# EAGLE board IO_Shield_With_Power_Supply_PCB (EAGLE 6.4)
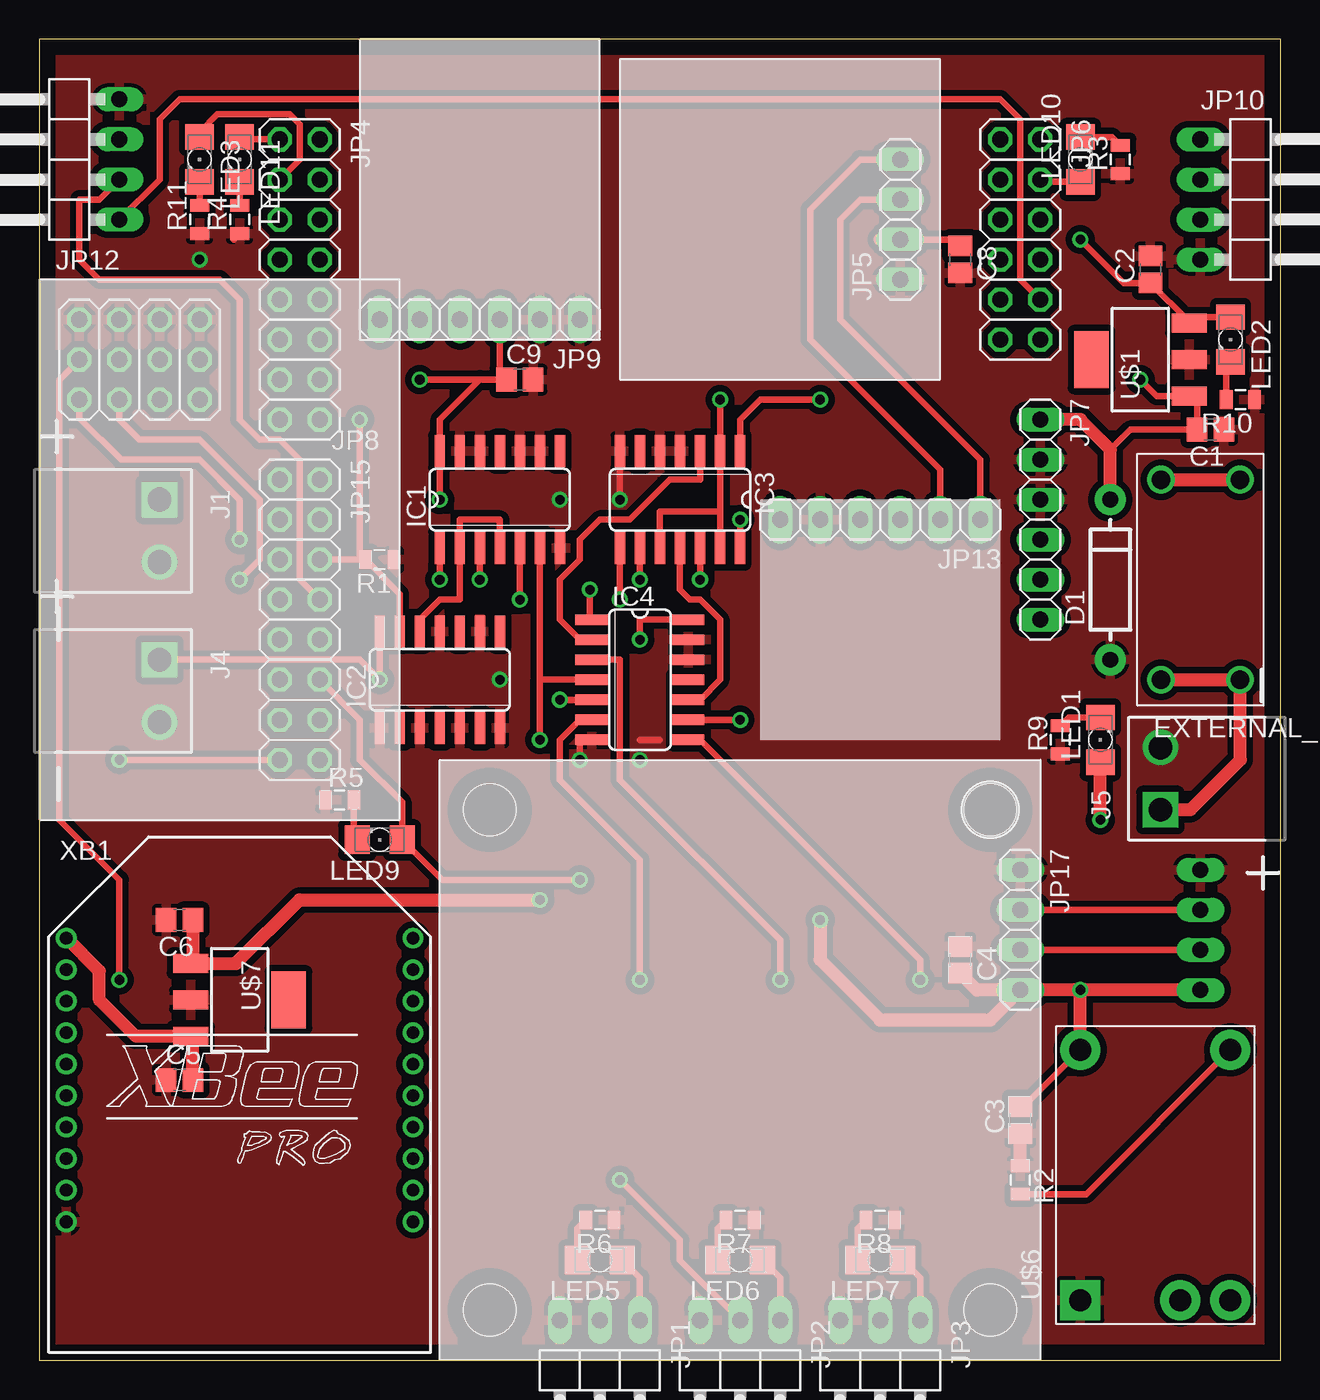
[diagram p0: board, top side]
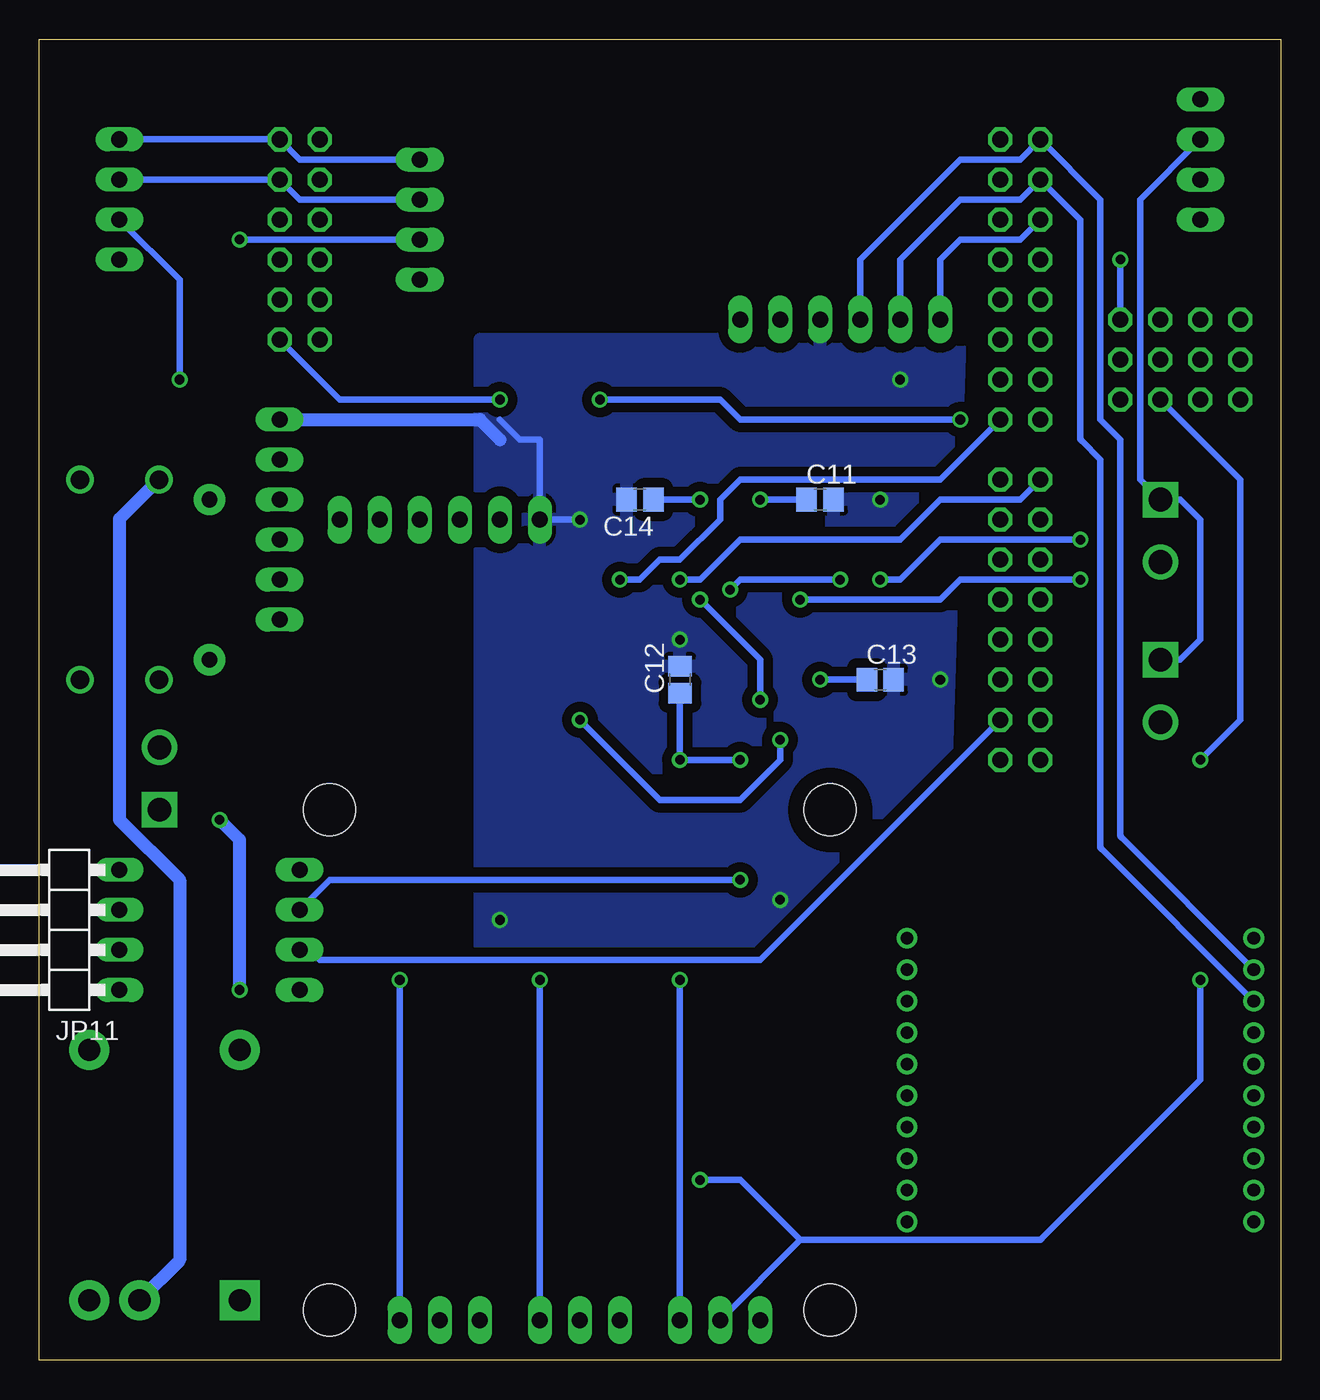
[diagram p1: board, bottom side, seen from below]

Size 78.74 x 83.82 mm. Coordinates in mm from the lower left corner, seen from the top.
Outline: 0,0 78.74,0 78.74,83.82 0,83.82 0,0
Copper layers (1*16): Top 0.035mm / dielectric 1.5mm / Bottom 0.035mm
Design rules "default *": minimum track width 10mil, minimum drill 24mil, track to track 8mil, track to pad 8mil, pad to pad 8mil, via to via 8mil, smd to smd 8mil, copper to edge 40mil, drill to drill 8mil, minimum pad ring 10mil, minimum via ring 8mil, stop-mask expansion 4mil, vias tented up to drill 0mil, thermal gap 10mil
tRestrict: area 27.4,47.8 to 29.7,48.8

## Footprints (pad centres in the part's own frame; a part is rotated, then mirrored left to right if it is on the bottom)
C0805 = smd 1.3 x 1.5: 1 -0.85,0; 2 0.85,0
DIODE-1N4001 = drill 1 pad 1.981: A -5.08,0; C 5.08,0
FUSE_2AG = drill 1.17: P$1 -2.5,6.35; P$2 2.5,6.35; P$3 -2.5,-6.35; P$4 2.5,-6.35
SO14 = smd 0.66 x 2.032: 1 -3.81,-3.073; 2 -2.54,-3.073; 3 -1.27,-3.073; 4 0,-3.073; 5 1.27,-3.073; 6 2.54,-3.073; 7 3.81,-3.073; 8 3.81,3.073; 9 2.54,3.073; 10 1.27,3.073; 11 0,3.073; 12 -1.27,3.073; 13 -2.54,3.073; 14 -3.81,3.073
SOCKET-FEMALE_RA-3.96MM-2 = drill 1.5 square: 1 0,0 | drill 1.5: 2 3.96,0
1X03/90 = drill 1.016 long: 1 -2.54,-3.81; 2 0,-3.81; 3 2.54,-3.81
2X08 = drill 1.016 octagon: 1 -8.89,-1.27; 2 -8.89,1.27; 3 -6.35,-1.27; 4 -6.35,1.27; 5 -3.81,-1.27; 6 -3.81,1.27; 7 -1.27,-1.27; 8 -1.27,1.27; 9 1.27,-1.27; 10 1.27,1.27; 11 3.81,-1.27; 12 3.81,1.27; 13 6.35,-1.27; 14 6.35,1.27; 15 8.89,-1.27; 16 8.89,1.27
1X04 = drill 1.016 long: 1 -3.81,0; 2 -1.27,0; 3 1.27,0; 4 3.81,0
2X06 = drill 1.016 octagon: 1 -6.35,-1.27; 2 -6.35,1.27; 3 -3.81,-1.27; 4 -3.81,1.27; 5 -1.27,-1.27; 6 -1.27,1.27; 7 1.27,-1.27; 8 1.27,1.27; 9 3.81,-1.27; 10 3.81,1.27; 11 6.35,-1.27; 12 6.35,1.27
1X06 = drill 1.016 long: 1 -6.35,0; 2 -3.81,0; 3 -1.27,0; 4 1.27,0; 5 3.81,0; 6 6.35,0
2X04 = drill 1.016 octagon: 1 6.35,-1.27; 2 6.35,1.27; 3 8.89,-1.27; 4 8.89,1.27; 5 11.43,-1.27; 6 11.43,1.27; 7 13.97,-1.27; 8 13.97,1.27; 9 6.35,3.81; 10 8.89,3.81; 11 11.43,3.81; 12 13.97,3.81
1X04/90 = drill 1.016 long: 1 -3.81,-3.81; 2 -1.27,-3.81; 3 1.27,-3.81; 4 3.81,-3.81
1X04' = drill 1.016 long: 1 -3.175,0; 2 -0.635,0; 3 1.905,0; 4 4.445,0
FKIT-LED-1206 = smd 1.6 x 1.803: A -1.422,0; C 1.422,0
0805 = smd 0.8 x 1.2: 1 -0.9,0; 2 0.9,0
SOT223 = smd 1.219 x 2.235: 1 -2.311,-3.099; 2 0,-3.099; 3 2.311,-3.099 | smd 3.6 x 2.2: 4 0,3.099
STAND-OFF = hole 3.302: 0,0
PTN78000 = drill 1.397 pad 2.54: ADJ 15.875,-9.525; INHIBIT 0,-9.525; V_IN 0,-6.35; V_OUT 15.875,0 | drill 1.397 pad 2.54 square: GND 0,0
XBEE-PRO = drill 0.8 pad 1.27: 1 -11,9; 2 -11,7; 3 -11,5; 4 -11,3; 5 -11,1; 6 -11,-1; 7 -11,-3; 8 -11,-5; 9 -11,-7; 10 -11,-9; 11 11,-9; 12 11,-7; 13 11,-5; 14 11,-3; 15 11,-1; 16 11,1; 17 11,3; 18 11,5; 19 11,7; 20 11,9

## Placement (x,y rotation side)
C1  47uf  [C0805]  74.3,59.05 180 top
C2  0.1uf  [C0805]  70.48,69.21 90 top
C3  0.1uf  [C0805]  62.23,15.24 90 top
C4  0.1uf  [C0805]  58.42,25.4 270 top
C5  0.1uf  [C0805]  8.89,17.78 0 top
C6  47uf  [C0805]  8.89,27.94 180 top
C8  0.1uf  [C0805]  58.42,69.85 270 top
C9  0.1uf  [C0805]  30.48,62.23 0 top
C11  0.1uf  [C0805]  29.21,54.61 0 bottom
C12  0.1uf  [C0805]  38.1,43.18 90 bottom
C13  0.1uf  [C0805]  25.4,43.18 0 bottom
C14  0.1uf  [C0805]  40.64,54.61 180 bottom
D1  [DIODE-1N4001]  67.94,49.53 90 top
EXTERNAL_POWER  FUSE  [FUSE_2AG]  73.66,49.53 0 top
IC1  74S08D  [SO14]  29.21,54.61 0 top
IC2  74LS04D  [SO14]  25.4,43.18 0 top
IC3  74S08D  [SO14]  40.64,54.61 180 top
IC4  74LS32D  [SO14]  38.1,43.18 270 top
J1  POW_CONNECTFEMALE-RA  [SOCKET-FEMALE_RA-3.96MM-2]  7.62,54.61 270 top
J4  POW_CONNECTFEMALE-RA  [SOCKET-FEMALE_RA-3.96MM-2]  7.62,44.45 270 top
J5  POW_CONNECTFEMALE-RA  [SOCKET-FEMALE_RA-3.96MM-2]  71.12,34.93 90 top
JP1  [1X03/90]  35.56,-1.27 180 top
JP2  [1X03/90]  44.45,-1.27 180 top
JP3  [1X03/90]  53.34,-1.27 180 top
JP4  [2X08]  16.51,68.58 270 top
JP5  [1X04]  54.61,72.39 90 top
JP6  [2X06]  62.23,71.12 270 top
JP7  [1X06]  63.5,53.34 270 top
JP8  [2X04]  16.51,64.77 180 top
JP9  [1X06]  27.94,66.04 180 top
JP10  [1X04/90]  77.47,73.66 270 top
JP11  [1X04/90]  77.47,27.3 90 bottom
JP12  [1X04/90]  1.27,76.2 90 top
JP13  [1X06]  53.34,53.34 180 top
JP15  [2X08]  16.51,46.99 270 top
JP17  [1X04']  62.23,27.94 270 top
LED1  [FKIT-LED-1206]  67.31,39.37 90 top
LED2  [FKIT-LED-1206]  75.56,64.77 270 top
LED3  [FKIT-LED-1206]  10.16,76.2 270 top
LED5  [FKIT-LED-1206]  35.56,6.35 180 top
LED6  [FKIT-LED-1206]  44.45,6.35 180 top
LED7  [FKIT-LED-1206]  53.34,6.35 180 top
LED9  [FKIT-LED-1206]  21.59,33.02 180 top
LED10  [FKIT-LED-1206]  66.04,76.2 90 top
LED11  [FKIT-LED-1206]  12.7,76.2 270 top
R1  4.7K  [0805]  21.59,50.8 180 top
R2  4.7K  [0805]  62.23,11.43 270 top
R3  470  [0805]  68.58,76.2 90 top
R4  470  [0805]  12.7,72.39 90 top
R5  470  [0805]  19.05,35.56 0 top
R6  470  [0805]  35.56,8.89 180 top
R7  470  [0805]  44.45,8.89 180 top
R8  470  [0805]  53.34,8.89 180 top
R9  470  [0805]  64.77,39.37 90 top
R10  470  [0805]  76.2,60.96 180 top
R11  470  [0805]  10.16,72.39 90 top
U$1  LM3940IMP-3.3  [SOT223]  69.85,63.5 90 top
U$2  [STAND-OFF]  60.33,3.17 0 top
U$3  [STAND-OFF]  28.57,3.17 0 top
U$4  [STAND-OFF]  28.57,34.93 0 top
U$5  [STAND-OFF]  60.33,34.93 0 top
U$6  PTN78000  [PTN78000]  66.04,3.81 90 top
U$7  LM3940IMP-3.3  [SOT223]  12.7,22.86 270 top
XB1  XBEE-PRO  [XBEE-PRO]  12.7,17.78 0 top

## Library data of the parts
C1-C6 C8 C9 C11-C14 = resistor
D1 EXTERNAL_POWER J1 J4 J5 LED1-LED3 LED5-LED7 LED9-LED11 R1-R11 U$2-U$6 = ASL
IC1-IC4 = 74xx-us
JP1-JP4 JP6-JP8 JP10-JP12 JP15 JP17 = pinhead
JP5 JP9 = SDLogger
JP13 = baro
U$1 U$7 = LM3940
XB1 = maxstream; MPN: XBP24-AWI-001; OC_FARNELL: 1337916; OC_NEWARK: 42M2667

## Nets
ENABLE: IC2.13 IC3.2 IC3.10 IC3.13 JP15.6 R1.2
GND: C1.1 C2.2 C3.1 C4.1 C5.1 C6.2 C8.2 C9.2 C11.1 C12.1 C13.1 C14.1 D1.A IC1.7 IC1.9 IC1.10 IC1.12 IC1.13 IC2.1 IC2.3 IC2.5 IC2.7 IC2.9 IC2.11 IC3.4 IC3.5 IC3.7 IC4.7 IC4.12 IC4.13 J1.2 J4.2 J5.2 JP1.3 JP2.3 JP3.3 JP5.1 JP7.2 JP7.3 JP8.1 JP8.3 JP8.5 JP8.7 JP9.1 JP9.2 JP10.4 JP11.4 JP12.4 JP13.5 JP17.1 R1.1 R2.1 R3.1 R4.1 R5.1 R6.1 R7.1 R8.1 R9.1 R10.1 R11.1 U$1.2 U$6.GND U$7.2 XB1.10
GPS_RX: JP11.3 JP15.12 JP17.2 LED9.A
GPS_TX: JP11.2 JP15.14 JP17.3
L.MOTOR: IC3.9 JP15.1
N$1: IC1.3 IC4.1
N$2: IC1.6 IC4.4 IC4.9
N$3: IC1.2 IC1.4 IC2.12
N$4: JP6.10 JP12.1
N$5: IC3.11 IC4.10
N$6: IC3.8 IC4.5
N$7: JP12.2 JP15.8
N$8: IC4.6 JP1.1 LED5.A
N$9: IC4.3 JP2.1 LED6.A
N$10: IC4.8 JP3.1 LED7.A
N$12: JP1.2 JP2.2 JP8.8
N$13: EXTERNAL_POWER.P$1 EXTERNAL_POWER.P$2 U$6.V_IN
N$14: JP8.10 JP15.15
N$15: C5.2 U$7.3 XB1.1
N$17: LED3.C R11.2
N$18: JP4.5 JP9.6
N$19: LED10.C R3.2
N$20: LED11.C R4.2
N$21: LED9.C R5.2
N$22: LED5.C R6.2
N$23: LED6.C R7.2
N$24: LED7.C R8.2
N$25: LED1.C R9.2
N$26: LED2.C R10.2
N$27: IC3.3 IC4.2
N$28: EXTERNAL_POWER.P$3 EXTERNAL_POWER.P$4 J5.1
N$35: R2.2 U$6.ADJ
R.MOTOR: IC3.12 JP4.16
REC.MOTOR: IC1.5 JP8.11
REC_RUDDER: IC1.1 JP8.12
RUDDER: IC3.1 JP6.12
SCL: JP5.4 JP6.2 JP10.1 JP13.2
SDA: JP5.3 JP6.4 JP10.2 JP13.1 LED10.A
VCC: C1.2 C3.2 C4.2 C6.1 C9.1 C11.2 C12.2 C13.2 C14.2 D1.C IC1.14 IC2.14 IC3.14 IC4.14 J1.1 J4.1 JP7.1 JP9.3 JP10.3 JP11.1 JP12.3 JP13.6 JP17.4 LED1.A U$1.1 U$6.V_OUT U$7.1
VDD: C2.1 C8.1 JP5.2 LED2.A U$1.3
XBEE_RX: JP4.1 JP9.4 LED11.A XB1.2
XBEE_TX: JP4.3 JP9.5 LED3.A XB1.3

## Tracks (layer width: path | path; a pad name or v marks a point on that pad's centre or on a via)
ENABLE  (via drill 0.61)
  Top 0.406: 43.18,53.85 IC3.13 | IC3.10 39.37,53.85 43.18,53.85 | v43.18,60.96 IC3.2 43.18,53.85 | JP15.6 R1.2 | IC2.13 22.86,48.63 R1.2 | R1.2 20.32,50.8 v20.32,59.69
  Bottom 0.406: v20.32,59.69 34.29,59.69 35.56,60.96 v43.18,60.96
GND  (via drill 0.61)
  Top 0.406: 38.1,39.37 39.37,39.37 | IC4.7 34.29,39.37 v34.29,38.1 | v36.83,54.61 IC3.7 | R4.1 12.33,71.12
  Top 0.813: R2.1 C3.1
  Bottom 0.406: v34.29,38.1 v38.1,38.1 C12.1 | C11.1 v33.02,54.61 | C13.1 v29.21,43.18 | C14.1 v36.83,54.61 | v10.16,69.85 JP8.1
  pour Top (isolate 0.406): 78.74,0 0,0 0,83.82 78.74,83.82
GPS_RX  (via drill 0.61)
  Top 0.406: JP15.12 20.32,40.64 20.32,38.1 23.01,35.41 LED9.A 25.55,30.48 v34.29,30.48 | JP17.2 JP11.3
  Bottom 0.406: v34.29,30.48 60.33,30.48 JP17.2
GPS_TX
  Top 0.406: JP17.3 JP11.2
  Bottom 0.406: JP15.14 33.02,25.4 60.96,25.4 61.59,26.04 JP17.3
L.MOTOR  (via drill 0.61)
  Top 0.406: v38.1,49.53 IC3.9
  Bottom 0.406: JP15.1 16.51,54.61 21.59,54.61 24.13,52.07 34.29,52.07 36.83,49.53 v38.1,49.53
N$1  (via drill 0.61)
  Top 0.406: 27.94,50.8 IC1.3 v27.94,49.53 | IC4.1 34.92,46.99 v34.92,48.9
  Bottom 0.406: v34.92,48.9 34.29,49.53 v27.94,49.53
N$2  (via drill 0.61)
  Top 0.406: IC1.6 31.75,43.18 | 31.75,43.18 IC4.4 | v31.75,39.37 31.75,43.18 | v44.45,40.64 IC4.9
  Bottom 0.406: v44.45,40.64 39.37,35.56 34.29,35.56 31.75,38.1 v31.75,39.37
N$3
  Top 0.406: 29.21,50.8 IC1.4 29.21,53.34 26.67,53.34 IC1.2 26.67,48.26 25.4,48.26 24.13,46.99 IC2.12
N$4
  Top 0.406: JP12.1 7.62,74.93 7.62,78.74 8.89,80.01 60.96,80.01 62.23,78.74 62.23,68.58 JP6.10
N$5
  Top 0.406: IC4.10 41.91,41.91 43.18,43.18 43.18,46.99 41.91,48.26 41.27,48.26 40.64,48.9 IC3.11
N$6  (via drill 0.61)
  Top 0.406: IC3.8 v36.83,48.26 | v33.02,41.91 IC4.5
  Bottom 0.406: v36.83,48.26 33.02,44.45 v33.02,41.91
N$7
  Top 0.406: JP12.2 3.81,73.66 2.54,73.66 2.54,69.85 3.81,68.58 11.43,68.58 12.7,67.31 12.7,59.69 13.97,58.42 15.24,58.42 16.51,57.15 16.51,49.53 JP15.8
N$8  (via drill 0.61)
  Top 0.406: IC4.6 34.29,40.64 33.02,39.37 33.02,36.83 38.1,31.75 v38.1,24.13 | JP1.1 38.1,5.23 LED5.A
  Bottom 0.406: v38.1,24.13 JP1.1
N$9  (via drill 0.61)
  Top 0.406: IC4.3 36.83,44.45 36.83,36.83 46.99,26.67 v46.99,24.13 | JP2.1 46.99,5.23 LED6.A
  Bottom 0.406: v46.99,24.13 JP2.1
N$10  (via drill 0.61)
  Top 0.406: IC4.8 41.91,39.37 55.88,25.4 v55.88,24.13 | JP3.1 55.88,5.23 LED7.A
  Bottom 0.406: v55.88,24.13 JP3.1
N$12  (via drill 0.61)
  Top 0.406: JP8.8 1.34,62.3 arc45 1.27,62.12 1.27,34.29 5.08,30.48 v5.08,24.13 | JP2.2 40.64,6.35 40.64,7.62 v36.83,11.43
  Bottom 0.406: 30.48,7.62 15.35,7.62 arc-45 15.17,7.69 5.08,17.78 v5.08,24.13 | 30.48,7.62 JP1.2 | v36.83,11.43 34.29,11.43 30.48,7.62
N$13
  Top 0.813: EXTERNAL_POWER.P$1 EXTERNAL_POWER.P$2
  Bottom 0.813: EXTERNAL_POWER.P$1 73.66,53.38 73.66,34.29 69.85,30.48 69.85,6.35 U$6.V_IN
N$14  (via drill 0.61)
  Top 0.406: JP15.15 5.18,38.1 arc-45 5.01,38.17 v5.08,38.1
  Bottom 0.406: JP8.10 2.54,55.88 2.54,40.64 v5.08,38.1
N$15
  Top 0.406: 9.74,20.41 U$7.3
  Top 0.813: U$7.3 6.12,20.55 3.81,22.86 3.81,24.67 XB1.1 | C5.2 9.74,20.41
N$17
  Top 0.406: R11.2 LED3.C
N$18
  Bottom 0.406: JP4.5 16.51,71.12 20.32,71.12 21.59,69.85 JP9.6
N$19
  Top 0.406: R3.2 68.06,77.62 LED10.C
N$20
  Top 0.406: R4.2 LED11.C
N$21
  Top 0.406: R5.2 19.95,33.24 LED9.C
N$22
  Top 0.406: LED5.C 34.14,8.37 R6.2
N$23
  Top 0.406: LED6.C 43.03,8.37 R7.2
N$24
  Top 0.406: LED7.C 51.92,8.37 R8.2
N$25
  Top 0.406: LED1.C 65.29,40.79 R9.2
N$26
  Top 0.406: R10.2 75.3,63.08 LED2.C
N$27
  Top 0.406: IC3.3 41.91,55.88 40,55.88 37.46,53.34 35.56,53.34 34.29,52.07 34.29,50.8 33.02,49.53 33.02,46.99 34.29,45.72 IC4.2
N$28
  Top 0.813: EXTERNAL_POWER.P$3 EXTERNAL_POWER.P$4 76.2,43.14 76.2,38.1 73.02,34.93 J5.1
N$35
  Top 0.406: R2.2 66.41,10.53 U$6.ADJ
R.MOTOR  (via drill 0.61)
  Top 0.406: v41.91,49.53 IC3.12
  Bottom 0.406: JP4.16 21.59,55.88 34.29,55.88 35.56,54.61 35.56,53.34 38.1,50.8 39.37,50.8 40.64,49.53 v41.91,49.53
REC.MOTOR  (via drill 0.61)
  Top 0.406: IC1.5 v30.48,48.26 | v12.7,49.53 13.97,50.8 13.97,54.61 10.16,58.42 6.35,58.42 5.08,59.69 JP8.11
  Bottom 0.406: v30.48,48.26 21.59,48.26 20.32,49.53 v12.7,49.53
REC_RUDDER  (via drill 0.61)
  Top 0.406: v25.4,49.53 IC1.1 | JP8.12 2.54,59.8 5.18,57.15 10.16,57.15 12.63,54.68 arc-45 12.7,54.51 v12.7,52.07
  Bottom 0.406: v25.4,49.53 24.13,49.53 21.59,52.07 v12.7,52.07
RUDDER  (via drill 0.61)
  Top 0.406: IC3.1 44.45,59.69 45.72,60.96 v49.53,60.96
  Bottom 0.406: JP6.12 59.69,60.96 v49.53,60.96
SCL
  Top 0.406: JP13.2 57.15,56.52 48.89,64.77 48.89,73.02 52.07,76.2 JP5.4
  Bottom 0.406: JP10.1 JP6.2 62.23,76.2 JP5.4
SDA
  Top 0.406: JP6.4 63.65,74.78 LED10.A | JP13.1 59.69,57.15 50.8,66.04 50.8,72.39 52.07,73.66 JP5.3
  Bottom 0.406: JP5.3 62.23,73.66 JP6.4 JP10.2
VCC  (via drill 0.61)
  Top 0.406: IC2.14 v21.59,43.18 20.32,44.45 J4.1 | IC4.14 38.1,46.99 v38.1,45.72 | JP9.3 29.21,62.65 C9.1 27.94,62.23 | IC3.14 v44.45,53.34 | v25.4,54.61 IC1.14 25.4,59.69 27.94,62.23 | v24.13,62.23 27.94,62.23 | 9.74,25.31 U$7.1 | C3.2 62.44,16.09 U$6.V_OUT | 67.94,57.79 69.22,59.05 C1.2 73.44,60.69 U$1.1 70.89,61.19 v69.85,62.23
  Top 0.813: C6.1 9.74,25.31 | v31.75,29.21 16.51,29.21 12.47,25.17 U$7.1 | v49.53,27.94 49.53,25.4 53.34,21.59 60.33,21.59 JP17.4 | JP11.1 v66.04,23.5 | v66.04,23.5 JP17.4 | U$6.V_OUT v66.04,23.5 | v67.31,34.29 LED1.A | D1.C 67.94,57.79 66.04,59.69 JP7.1 | JP17.4 59.47,23.5 C4.2
  Bottom 0.406: v44.45,53.34 46.95,53.34 | J4.1 6.35,44.45 5.08,45.72 5.08,53.34 6.35,54.61 J1.1 8.89,55.88 8.89,73.66 JP12.3 | v69.85,62.23 69.85,68.58 JP10.3 | 49.53,59.69 48.26,58.42 46.99,58.42 JP13.6
  Bottom 0.813: v66.04,23.5 66.04,33.02 v67.31,34.29 | JP7.1 50.8,59.69 49.53,58.42
  pour Bottom (isolate 0.61): 50.8,64.77 50.8,25.4 21.59,25.4 20.32,64.77
VDD  (via drill 0.61)
  Top 0.406: C8.1 58,71.12 JP5.2 | v66.04,71.12 68.8,68.36 C2.1 72.95,65.9 U$1.3 73.33,66.19 LED2.A
  Top 0.813: 53.34,71.12 JP5.2
  Bottom 0.406: v66.04,71.12 JP5.2
XBEE_RX
  Top 0.406: LED11.A 12.85,77.47 JP4.1
  Bottom 0.406: JP9.4 26.67,69.85 20.32,76.2 16.51,76.2 JP4.1 11.43,73.66 11.43,59.69 10.16,58.42 10.16,33.35 arc-45 10.09,33.17 XB1.2
XBEE_TX
  Top 0.406: JP4.3 16.51,76.2 16.51,78.42 15.87,79.06 11.28,79.06 10.16,77.94 LED3.A
  Bottom 0.406: JP9.5 24.13,69.85 20.32,73.66 16.51,73.66 JP4.3 12.7,72.39 12.7,58.53 arc-45 12.63,58.35 11.43,57.15 11.43,32.62 arc-45 11.36,32.44 XB1.3